# Altium PCB DC-DC-converter_v2.PcbDoc
Units mm, origin at the board's own origin, x right, y up, seen from the top; angles counter-clockwise.
Board outline 47.78 x 59.86 mm, 2 copper layers (Top Layer, Bottom Layer), stack 1.671 mm thick; 19 components, 14 nets, 64 pads, 11 vias.
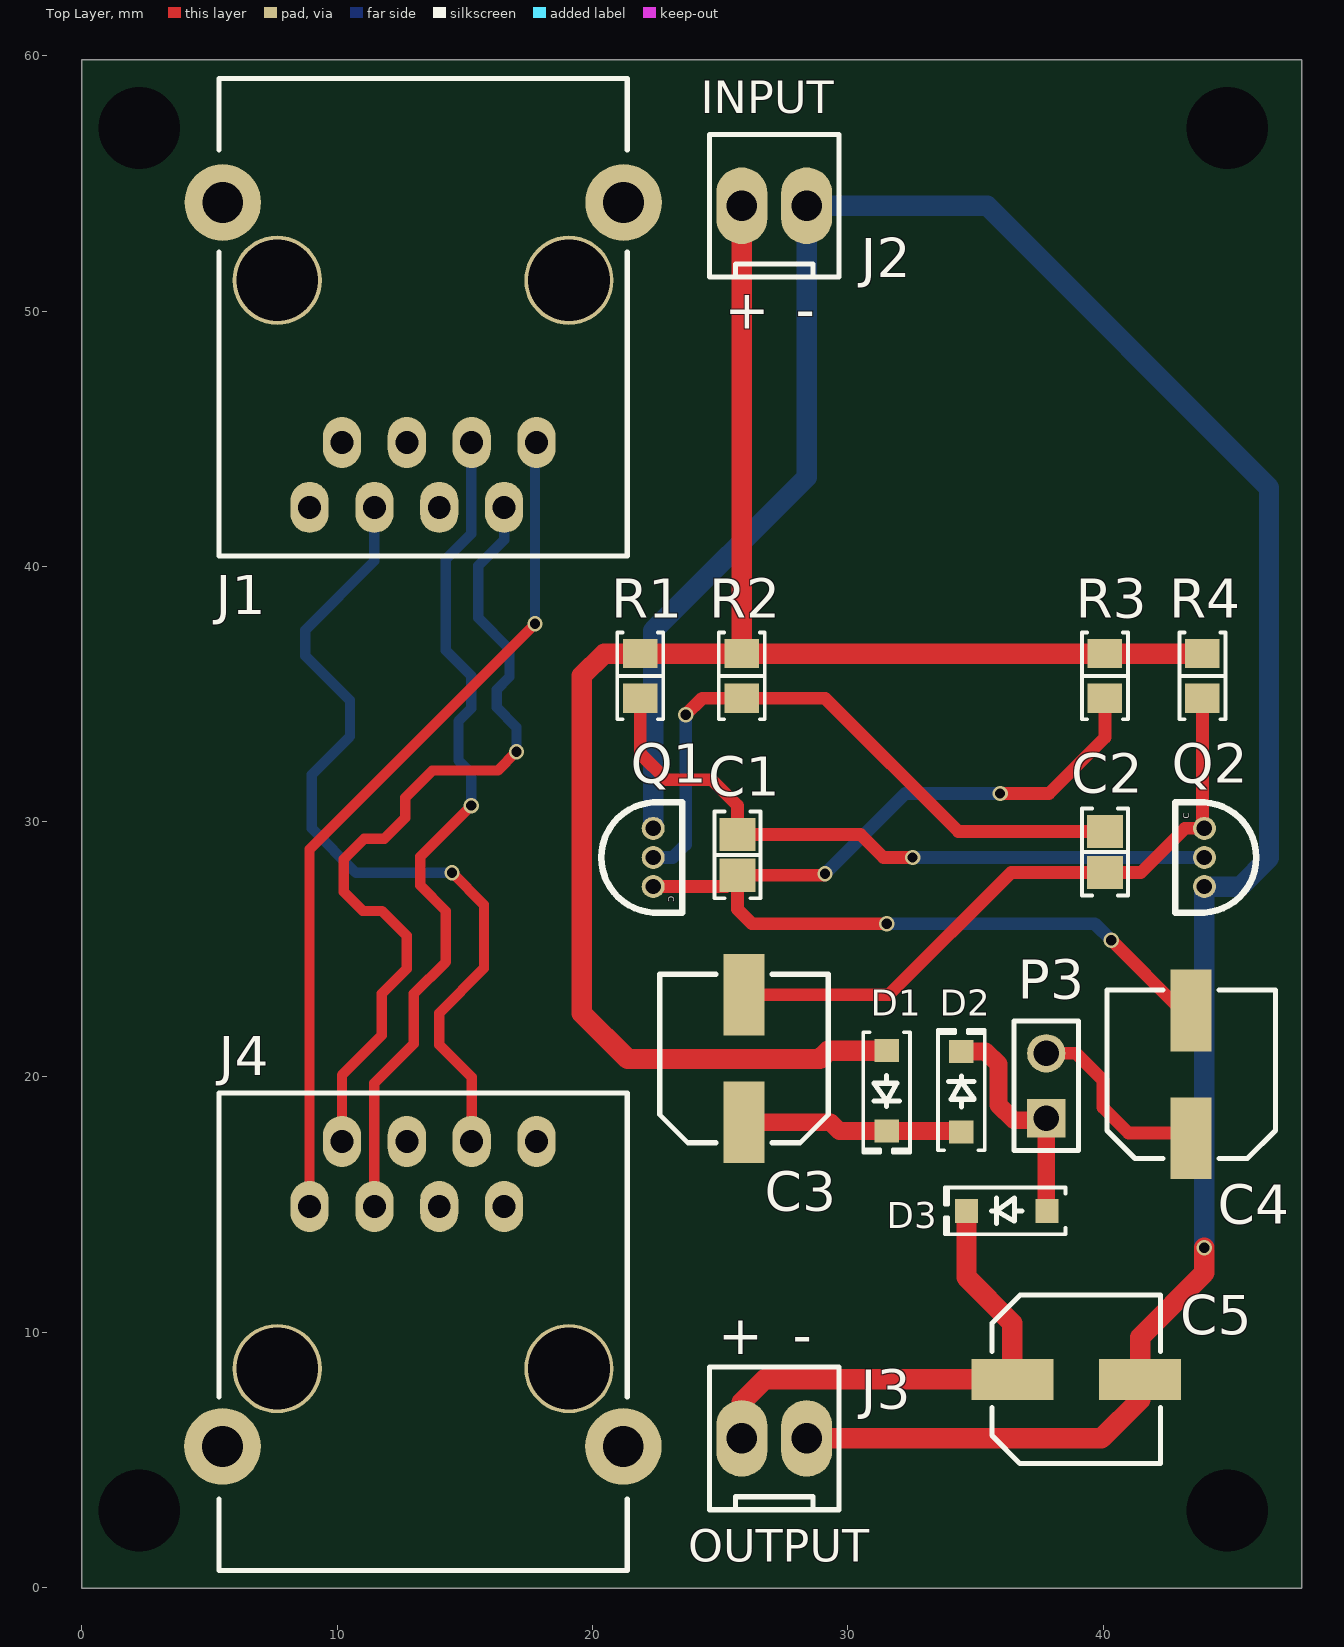
[diagram p0: Top Layer view]
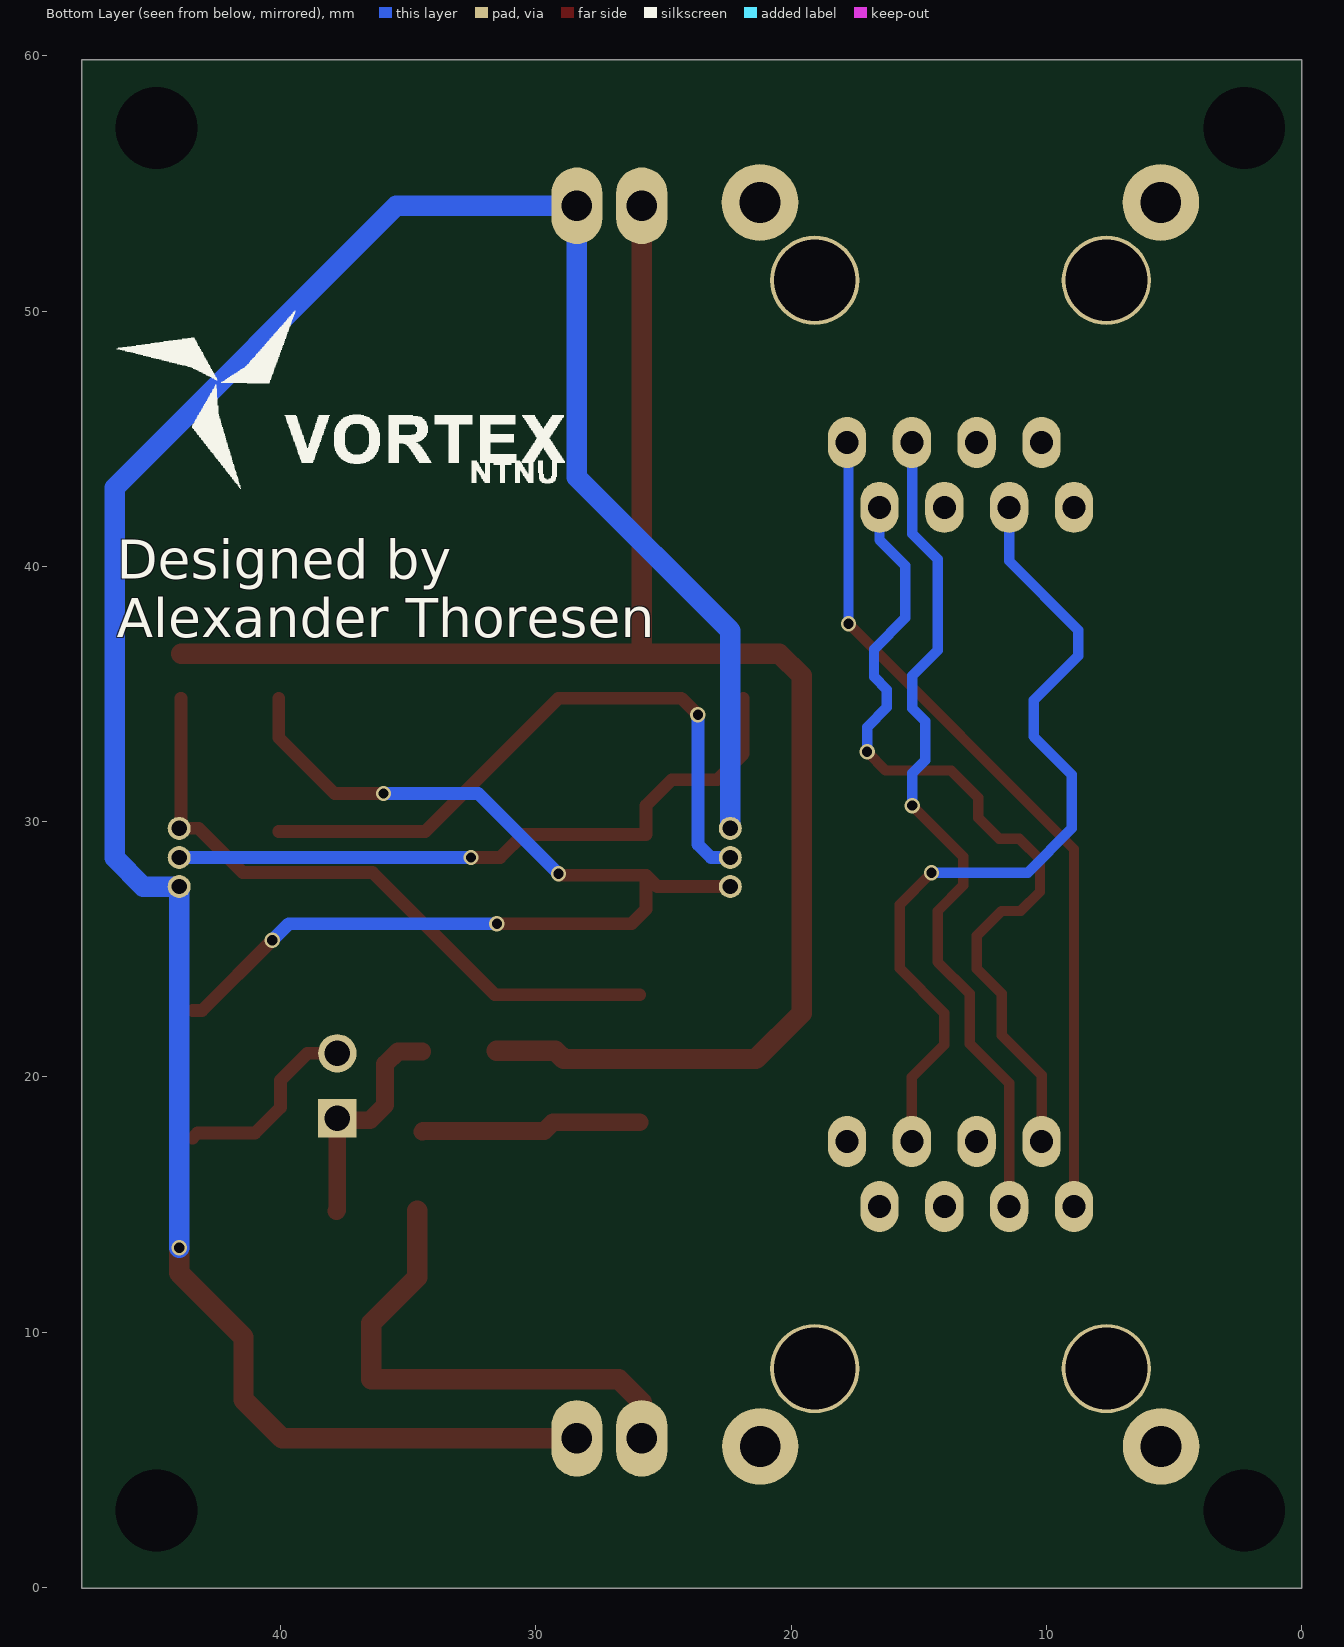
[diagram p1: Bottom Layer view, seen from below]
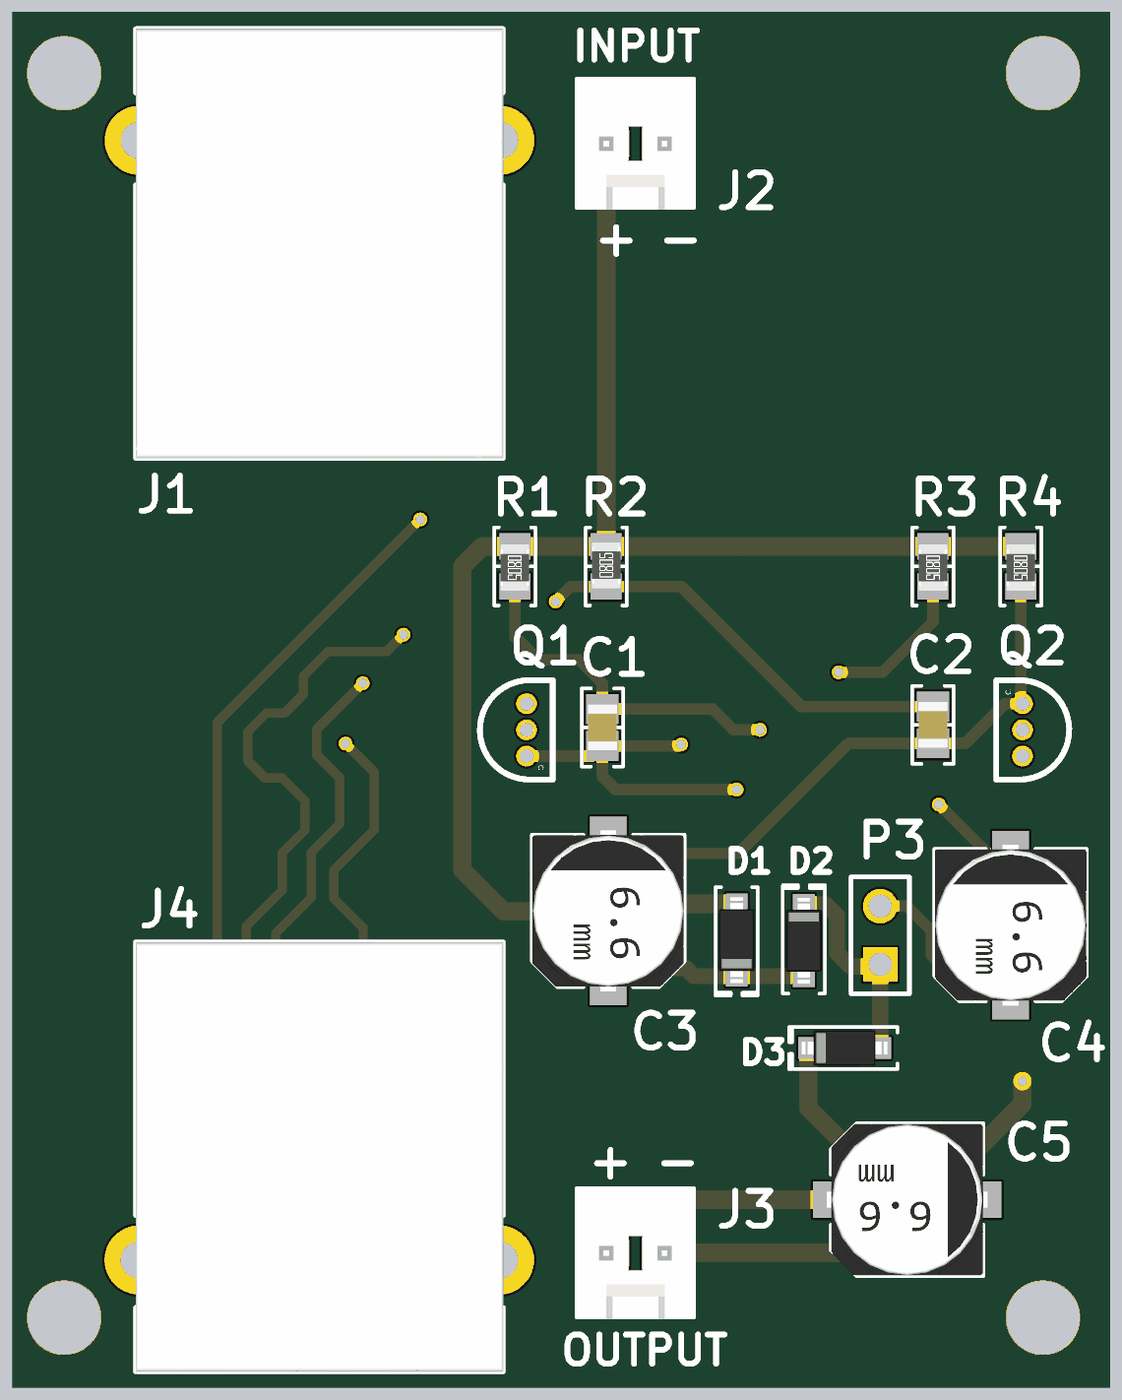
[diagram p2: 3D render of the assembled board from above, using the file's embedded part models]

## Layer stack, top to bottom
Top Solder: solder mask 0.0102, Solder Resist, Dk 3.5
Top Layer: signal copper 0.0356
Dielectric 1: dielectric 1.6, FR-4, Dk 4.8
Bottom Layer: signal copper 0.0356
Bottom Solder: solder mask 0.0102, Solder Resist, Dk 3.5

## Board outline
0,-0.025 47.78,-0.025 47.78,59.837 0,59.837

## Design rules (kind name [scope] priority, off if disabled: settings)
Clearance [All] p1: gap=0.127 ignorepadtopadclearanceinfootprint=FALSE
HoleSize [All] p1: absolutevalues=TRUE maxlimit=6.3 minlimit=0.3 maxpercent=80.000 minpercent=20.000
MinimumSolderMaskSliver [All] p1: minsoldermaskwidth=0.04
PolygonConnect [All] p1: connectstyle=Relief reliefconductorwidth=0.254 reliefentries=4 polygonreliefangle="90 Angle" airgapwidth=0.254
RoutingVias [All] p1: holewidth=0.3 width=0.6 viastyle="Through Hole" minholewidth=0.3 minwidth=0.6 maxholewidth=0.4 maxwidth=0.6
SilkToSolderMaskClearance [IsPad] p1: minsilkscreentomaskgap=0.04 clearancetoexposedcopper=TRUE
SolderMaskExpansion [All] p1: expansion=0.102
Width Default [All] p1: maxlimit=1 minlimit=0.2 preferedwidth=0.406
Width IN [InNet('IN')] p2: maxlimit=1 minlimit=0.3 preferedwidth=0.6
Width OUT [InNet('NetC4_1')] p3: maxlimit=1 minlimit=0.3 preferedwidth=0.7
Width GND [InNet('GND')] p4: maxlimit=1 minlimit=0.3 preferedwidth=0.6
27 further rules are at their usual default settings.

## Components (designator, comment, footprint, x,y, rotation, side; value= is the part's Value field where it differs from the comment)
C1 "10n" "CAP 0805_2012" 25.682,28.698 r90 top
C2 "10n" "CAP 0805_2012" 40.073,28.811 r270 top
C3 "10µF" "CAP ALSMD 6.6MM H6.1MM" 25.936,20.721 r90 top
C4 "10µF" "CAP ALSMD 6.6MM H6.1MM" 43.45,20.1 r90 top
C5 "10µF" "CAP ALSMD 6.6MM H6.1MM" 38.95,8.15 r0 top
D1 "MBR0580-TP" SOD-123 31.524,19.451 r270 top
D2 "MBR0580-TP" SOD-123 34.45,19.425 r90 top
D3 "MBR0580-TP" SOD-123 36.225,14.75 r180 top
J1 "A-2004-2-4-LPS-N-R" "ASSMANN A-2004-2-4-LPS-N-R" 13.363,49.811 r180 top
J2 "INPUT" "MOLEX KK 0022272021" 27.119,54.122 r0 top
J3 "OUTPUT" "MOLEX KK 0022272021" 27.119,5.84 r0 top
J4 "A-2004-2-4-LPS-N-R" "ASSMANN A-2004-2-4-LPS-N-R" 13.363,9.965 r0 top
P3 "Header 2" HDR1X2 37.775,18.385 r90 top
Q1 "BC547B" BC547B 22.38,28.595 r270 top
Q2 "BC547B" BC547B 43.97,28.595 r90 top
R1 "40k" "RES 0805_2012" 21.872,35.707 r270 top
R2 "40k" "RES 0805_2012" 25.849,35.707 r90 top
R3 "1k" "RES 0805_2012" 40.073,35.707 r270 top
R4 "1k" "RES 0805_2012" 43.894,35.707 r270 top

## Footprints (in the part's own frame and the unit in brackets; to place one, negate y for a bottom-side part, rotate by r counter-clockwise, add the part's x,y. Pads: shape width x height; smd on the part's side, far side on the other; paste and mask are expansions set on the pad)
"ASSMANN A-2004-2-4-LPS-N-R" [mm]
  oval 1.5x2 hole 0.9: 1(-4.445,4.96) 2(-3.175,7.5) 3(-1.905,4.96) 4(-0.635,7.5) 5(0.635,4.96) 6(1.905,7.5) 7(3.175,4.96) 8(4.445,7.5)
  round 3 hole 1.6: S(-7.855,-4.44) S(7.845,-4.44)
  round 3.5 hole 3.2: S(-5.715,-1.39) S(5.715,-1.39)
  silkscreen extent -8,-9.3 8,9.4, body extent -8,-9.3 8,9.4, height 13.3
BC547B [mm]
  round 0.9 hole 0.6: 1(1.14,0) 2(0,0) 3(-1.14,0)
  silkscreen extent -2.16,-2.03 2.16,1.14
"CAP 0805_2012" [mm] "Chip Capacitor, 2-Leads, Body 2.00x1.20mm, IPC Medium Density"
  rect 1.3x1.4 smd: 1(-0.8,0) 2(0.8,0)
  silkscreen extent -1.7,-0.9 1.7,0.9, body extent -1,-0.64 1,0.64, height 1.26
"CAP ALSMD 6.6MM H6.1MM" [mm] "Aluminum Electrolytic Capacitor, Body 6.60x6.60x6.10mm, IPC Low Density"
  rect 3.2x1.6 smd: 1(-2.5,0) 2(2.5,0)
  silkscreen extent -3.3,-3.3 3.3,3.3, body extent -3.5,-3.3 3.5,3.3, height 6.1
HDR1X2 [mm] "Connector; Header; 2 Position"
  rect 1.5x1.5 hole 1: 1(0,0)
  round 1.5 hole 1: 2(2.54,0)
  silkscreen extent -1.27,-1.27 3.81,1.27
"MOLEX KK 0022272021" [mm]
  oval 2x3 hole 1.2: 1(-1.27,0) 2(1.27,0)
  silkscreen extent -2.54,-2.79 2.54,2.79, body extent -2.54,-2.9 2.54,2.9, height 11.7
"RES 0805_2012" [mm] "Chip Resistor, 2-Leads, Body 2.00x1.25mm, IPC Medium Density"
  rect 1.15x1.35 smd: 1(-0.875,0) 2(0.875,0)
  silkscreen extent -1.7,-0.9 1.7,0.9, body extent -0.95,-0.62 1.05,0.63, height 0.6
SOD-123 [mm] "SOD, 2-Leads, Body 1.55x3.70mm, IPC Medium Density"
  rect 0.9x0.95 smd: 1(-1.575,0) 2(1.575,0)
  silkscreen extent -2.3,-0.92 2.41,0.92, body extent -1.86,-0.78 1.86,0.77, height 1.35

## Part data
C1 C2: library part CBR08C330JAGAC, "CAP CER 33PF 250V C0G/NP0 0805", Part Number=CBR08C330JAGAC
C3 C4 C5: library part EDK106M063A9GAA, "CAP ALUM 10UF 20% 63V SMD", Device Package="Radial, Can - SMD", Lifetime @ Temp.="2000 Hrs @ 85°C", Manufacturer=KEMET, Operating Temperature="-40°C ~ 85°C", Ripple Current @ High Frequency="25mA @ 10kHz", Ripple Current @ Low Frequency="20mA @ 120Hz", Supplier Part Number 1=399-6049-1-ND, Tolerance=±20%, Voltage - Rated=63V, Applications="General Purpose", Capacitance=10µF, ComponentLink1Description=Datasheet, ComponentLink1URL=https://api.kemet.com/component-edge/download/datasheet/EDK106M063A9GAA.pdf, ComponentLink2Description="DigiKey Link", ComponentLink2URL=http://digikey.com/product-detail/en/kemet/EDK106M063A9GAA/399-6049-1-ND/2712581, Height - Seated (Max)="0.217\" (5.50mm)", LastUpdated="19/01/2020 00:13:02", Lifecycle Status=Active, Minimum Order=1, Mounting Type="Surface Mount", Package / Case="Radial, Can - SMD", Packaging=TapeAndReel, PartId=8976, Part Number=EDK106M063A9GAA, Part Status=Active, Polarization=Polar, Price=0.09, Series=EDK, Size / Dimension="0.248\" Dia (6.30mm)", Supplier 1=DigiKey, Surface Mount Land Size="0.260\" L x 0.260\" W (6.60mm x 6.60mm)"
D1 D2 D3: "DIODE SCHOTTKY 80V 500MA SOD123", Capacitance @ Vr, F="30pF @ 4V, 1MHz", Current - Average Rectified (Io)=500mA, Current - Reverse Leakage @ Vr="200µA @ 80V", Device Package=SOD-123, Manufacturer="Micro Commercial Co", Operating Temperature - Junction="-55°C ~ 150°C", Supplier Part Number 1=MBR0580-TPMSCT-ND, Voltage - DC Reverse (Vr) (Max)=80V, Voltage - Forward (Vf) (Max) @ If="800mV @ 500mA", ComponentLink1Description=Datasheet, ComponentLink1URL=https://www.mccsemi.com/pdf/Products/MBR0520~MBR0580(SOD123).pdf, ComponentLink2Description="DigiKey Link", ComponentLink2URL=http://digikey.com/product-detail/en/micro-commercial-co/MBR0580-TP/MBR0580-TPMSCT-ND/2423306, Diode Type=Schottky, LastUpdated="19/01/2020 00:13:21", Lifecycle Status=Active, Minimum Order=1, Mounting Type="Surface Mount", Package / Case=SOD-123, Packaging=TapeAndReel, PartId=2228, Part Number=MBR0580-TP, Part Status=Active, Price=0.04, Series=-, Speed="Fast Recovery =< 500ns, > 200mA (Io)", Supplier 1=DigiKey, Supplier Device Package=SOD-123
J1 J4: "CONN MOD JACK 8P8C R/A SHIELDED", LED Color="Does Not Contain LED", Manufacturer="Assmann WSW Components", Supplier Part Number 1=AE10387-ND, ComponentLink1Description=Datasheet, ComponentLink1URL=http://www.assmann-wsw.com/fileadmin/datasheets/ASS_7323_CO.pdf, ComponentLink2Description="DigiKey Link", ComponentLink2URL=http://digikey.com/product-detail/en/assmann-wsw-components/A-2004-2-4-LPS-N-R/AE10387-ND/2183638, Connector Type=Jack, Contact Finish=Gold, Contact Material="Phosphor Bronze", Custom Description1=ToSonar, Features="Board Lock", LastUpdated="15/01/2020 03:54:20", Lifecycle Status=Active, Minimum Order=1, Mounting Type="Through Hole", Number of Ports=1, Number of Positions/Contacts="8p8c (RJ45, Ethernet)", Number of Rows=1, Orientation="90° Angle (Right)", Packaging=Tray, Part Number=A-2004-2-4-LPS-N-R, Part Status=Active, Price=1.05, Series=-, Shielding=Shielded, Supplier 1=DigiKey, Tab Direction=Down, Termination=Solder
  J1: Custom Description 2=ToHouse
  J4: Custom Description 2=ToSonar
J2 J3: library part 0022272021, "CONN HEADER VERT 2POS 2.54MM", Insulation Color=Natural, Manufacturer=Molex, Material Flammability Rating="UL94 V-0", Supplier Part Number 1=WM4111-ND, ComponentLink1Description=Datasheet, ComponentLink1URL=https://www.molex.com/pdm_docs/sd/022272021_sd.pdf, ComponentLink2Description="DigiKey Link", ComponentLink2URL=http://digikey.com/product-detail/en/molex/0022272021/WM4111-ND/1130577, Connector Type=Header, Contact Finish - Mating=Tin, Contact Finish - Post=Tin, Contact Finish Thickness - Mating="100.0µin (2.54µm)", Contact Length - Mating="0.295\" (7.49mm)", Contact Length - Post="0.140\" (3.56mm)", Contact Material=Brass, Contact Shape=Square, Contact Type="Male Pin", Fastening Type="Friction Lock", Insulation Height="0.461\" (11.70mm)", Insulation Material="Polyamide (PA), Nylon", LastUpdated="12/01/2020 23:51:43", Lifecycle Status=Active, Minimum Order=1, Mounting Type="Through Hole", Number of Positions=2, Number of Positions Loaded=All, Number of Rows=1, Overall Contact Length="0.560\" (14.22mm)", Packaging=Bulk, PartId=76, Part Number=0022272021, Part Status=Active, Pitch - Mating="0.100\" (2.54mm)", Price=0.27, Series="KK 6410", Shrouding="Shrouded - 1 Wall", Style="Board to Cable/Wire", Supplier 1=DigiKey, Termination=Solder
  J2: Custom Description=INPUT
  J3: Custom Description=OUTPUT
P3: "Header, 2-Pin", LatestRevisionDate=17-Jul-2002, LatestRevisionNote="Re-released for DXP Platform.", Publisher="Altium Limited"
R1 R2 R3 R4: library part TLRZ2ATTD, "RES 0 OHM JUMPER 0805", Part Number=TLRZ2ATTD

## Free pads (board coordinates)
  round 3.048 hole 3.2: 1(2.25,57.17) 2(44.859,57.17) 3(44.859,3.015) 4(2.25,3.015)

## Via types
v1: diameter 0.6, hole 0.4, Top Layer to Bottom Layer, 11 vias

## Nets (pads, with @x,y where several pads share a name; then routed paths per layer and width w, separated by ;. In a path a pad name is that pad's centre, name@x,y a point inside that pad or via, vN(x,y) a via of type N, cw(c..) or ccw(c..) an arc to the next point about the centre after c; other vN are vias at no path point)
GND: C5.2 J2.2 J3.2 Q1.3 Q2.3 | length 101.9
  Top Layer w0.8: J3.2 39.94,5.84 41.45,7.35 C5.2 41.45,9.8 43.967,12.317 v1(43.967,13.31)
  Bottom Layer w0.8: Q1.3 22.38,37.485 28.389,43.494 J2.2 35.461,54.122 46.5,43.083 46.5,28.585 45.37,27.455 Q2.3 43.97,13.312 v1(43.967,13.31)
IN: D1.1 J2.1 R1.1 R2.2 R3.1 R4.1 | length 68.2
  Top Layer w0.8: J2.1 R2.2 ; D1.1 29.238,21.026 28.912,20.7 21.385,20.7 19.586,22.499 19.586,35.707 20.461,36.582 R1.1 R2.2 ; R4.1 R3.1 R2.2
NetC1_2: C1.2 Q2.2 R1.2 | length 26.6
  Top Layer w0.5: R1.2 21.872,32.659 22.888,31.643 24.666,31.643 25.682,30.627 C1.2 30.494,29.498 31.397,28.595 v1(32.54,28.595)
  Bottom Layer w0.5: v1(32.54,28.595) Q2.2
NetC2_1: C2.1 Q1.2 R2.1 | length 25.4
  Top Layer w0.5: v1(23.65,34.183) 24.299,34.832 R2.1 29.111,34.832 34.332,29.611 C2.1
  Bottom Layer w0.5: Q1.2 23.142,28.595 23.65,29.103 v1(23.65,34.183)
NetC3_1: C3.1 D1.2 D2.1 | length 8.7
  Top Layer w0.7: C3.1 29.325,18.221 29.67,17.876 D1.2 34.424,17.876 D2.1
NetC4_1: C4.1 P3.2 | length 7.7
  Top Layer w0.5: P3.2 38.942,20.925 40,19.867 40,18.8 41,17.8 43.25,17.8 C4.1
NetC5_1: C5.1 D3.2 J3.1 | length 19.7
  Top Layer w0.8: J3.1 25.849,7.249 26.75,8.15 C5.1 36.45,10.35 34.65,12.15 D3.2
NetD2_2: D2.2 D3.1 P3.1 | length 9.1
  Top Layer w0.7: D2.2 35.4,21 35.9,20.5 35.9,18.9 36.5,18.3 37.69,18.3 P3.1 37.775,14.775 D3.1
Rx+: J1.3 J4.3 | length 33.6
  Top Layer w0.406: J4.3 11.458,19.75 13,21.292 13,23.25 14.25,24.5 14.25,26.498 13.25,27.498 13.25,28.627 v1(15.25,30.627)
  Bottom Layer w0.406: v1(15.25,30.627) 15.25,31.897 14.75,32.397 14.75,33.937 15.25,34.437 15.25,35.707 14.25,36.707 14.25,40.281 15.25,41.281 15.25,44.833 J1.3
Rx-: J1.6 J4.6 | length 33.6
  Top Layer w0.406: v1(14.5,28) 15.75,26.75 15.75,24.25 14,22.5 14,21.25 15.268,19.982 J4.6
  Bottom Layer w0.406: J1.6 11.458,40.208 8.75,37.5 8.75,36.5 10.5,34.75 10.5,33.332 9,31.832 9,29.735 10.735,28 v1(14.5,28)
Tx+: J1.1 J4.1 | length 33.6
  Top Layer w0.406: J4.1 8.918,28.918 v1(17.75,37.75)
  Bottom Layer w0.406: v1(17.75,37.75) 17.75,44.793 J1.1
Tx-: J1.2 J4.2 | length 33.6
  Top Layer w0.406: J4.2 10.188,20.067 11.75,21.628 11.75,23.25 12.728,24.228 12.728,25.522 11.75,26.5 11,26.5 10.25,27.25 10.25,28.522 11.057,29.329 11.844,29.329 12.671,30.156 12.671,30.943 13.728,32 16.288,32 v1(17.022,32.734)
  Bottom Layer w0.406: J1.2 16.538,41.038 15.522,40.022 15.522,37.978 16.75,36.75 16.75,35.666 16.25,35.166 16.25,34.471 17.022,33.699 v1(17.022,32.734)
WAVE_GEN1: C2.2 C3.2 Q2.1 R4.2 | length 25.9
  Top Layer w0.5: C3.2 31.611,23.221 36.401,28.011 C2.2 41.481,28.011 43.205,29.735 Q2.1@43.818,29.735 ; R4.2 43.894,29.811 Q2.1@43.818,29.735 ; Q2.1 Q2.1@43.818,29.735
WAVE_GEN2: C1.1 C4.2 Q1.1 R3.2 | length 42.4
  Top Layer w0.5: Q1.1 25.239,27.455 C1.1 ; v1(29.111,27.96) 29.049,27.898 C1.1 ; v1(31.525,26) 26.25,26 25.682,26.568 C1.1 ; v1(35.969,31.1) 37.879,31.1 40.073,33.294 R3.2 ; v1(40.325,25.35) 43.075,22.6 C4.2
  Bottom Layer w0.5: v1(29.111,27.96) 32.251,31.1 v1(35.969,31.1) ; v1(31.525,26) 39.675,26 v1(40.325,25.35)
pads on no net: J1.4 J1.5 J1.7 J1.8 J1.S J4.4 J4.5 J4.7 J4.8 J4.S

## Silkscreen, mask and mechanical layers (free items; w line width, h text height)
Top Overlay:
  text "+" at 25.174,49.296 h1.52
  text "-" at 27.968,49.296 h1.52
  text "+" at 24.92,9.142 h1.52
  text "-" at 27.841,9.142 h1.52
Bottom Overlay:
  drawing of 1208 lines, arcs and shapes, not listed
  text "Designed by  / Alexander Thoresen" at 46.408,37.231 h1.52
Board Outline:
  lines w0.1: 0,-0.002 47.75,-0.002 ; 0,0 0,59.825 47.75,59.825 47.75,0

## Text inside footprints (layer, text, board x,y; h text height)
Q1: Top Overlay "C" at 22.888,27.071 h0.38 r270
Q2: Top Overlay "C" at 43.462,30.119 h0.38 r90